# Altium PCB PCB1.PcbDoc
Units mil, origin at the board's own origin, x right, y up, seen from the top; angles counter-clockwise.
Board outline 6000 x 4000 mil, 2 copper layers (Top Layer, Bottom Layer); 11 components, 10 nets, 54 pads, 4 vias.
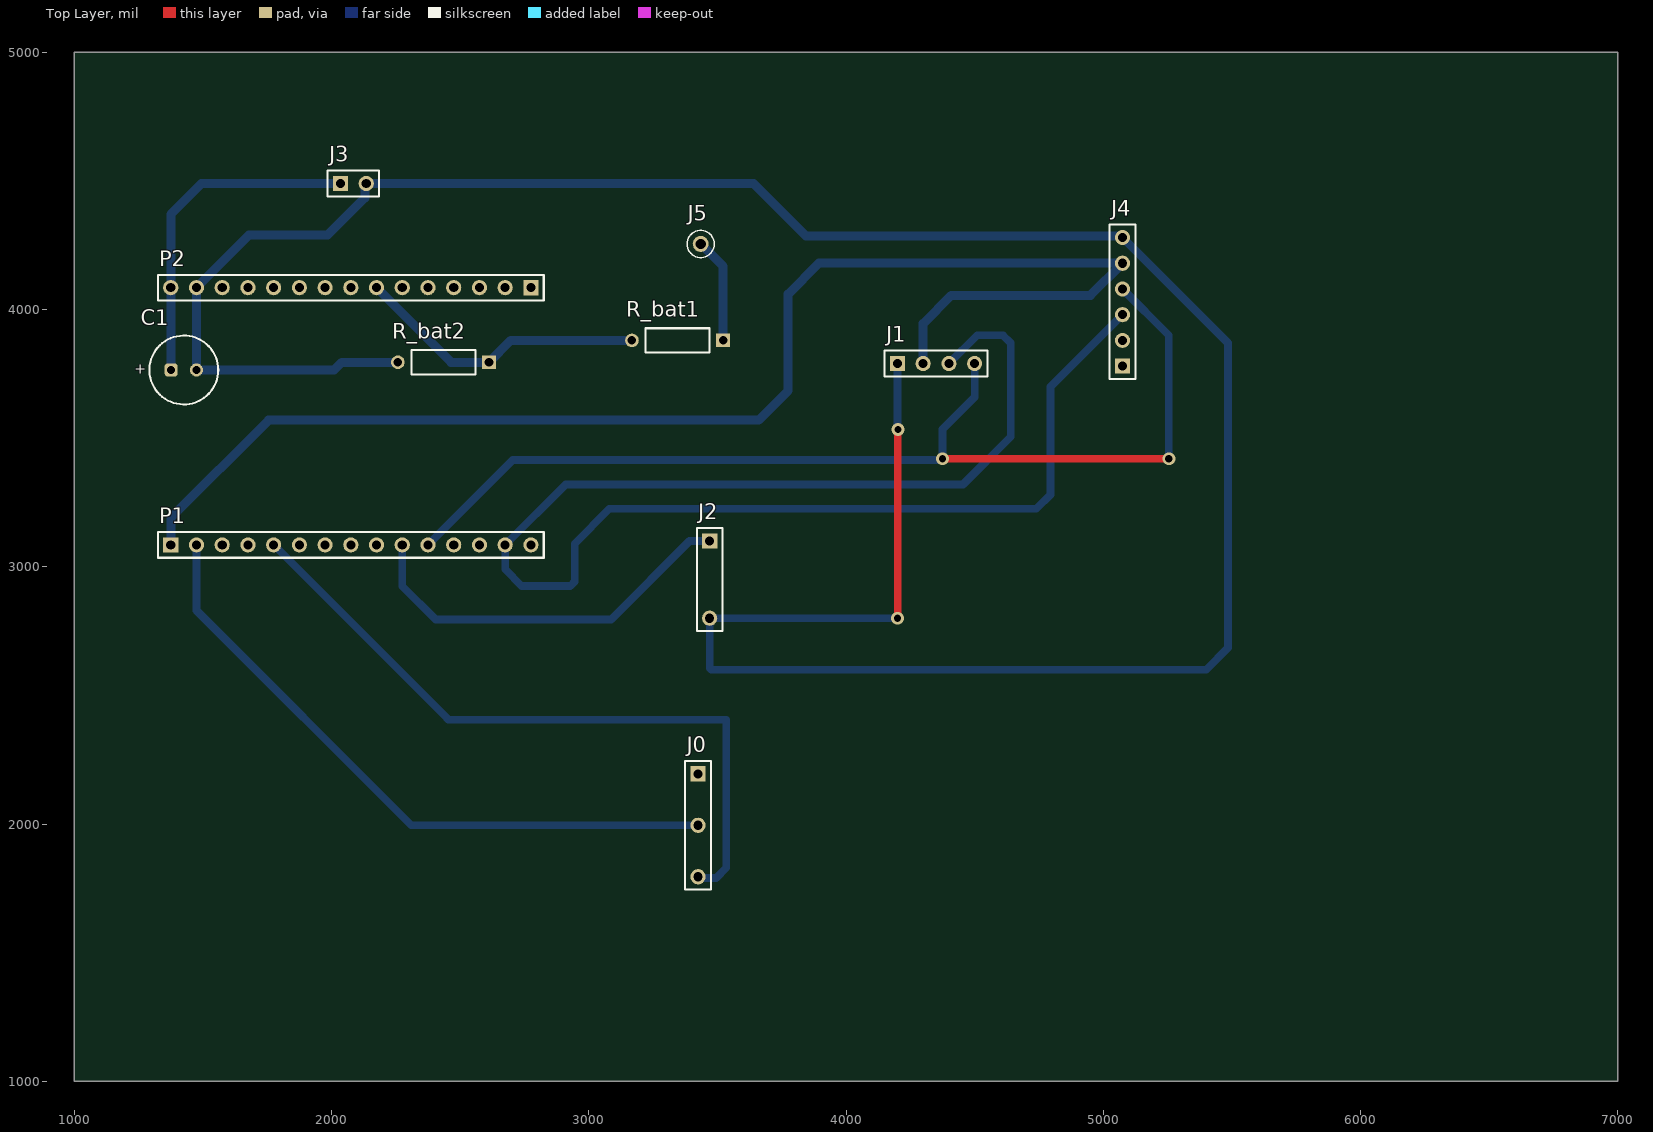
[diagram p0: Top Layer view]
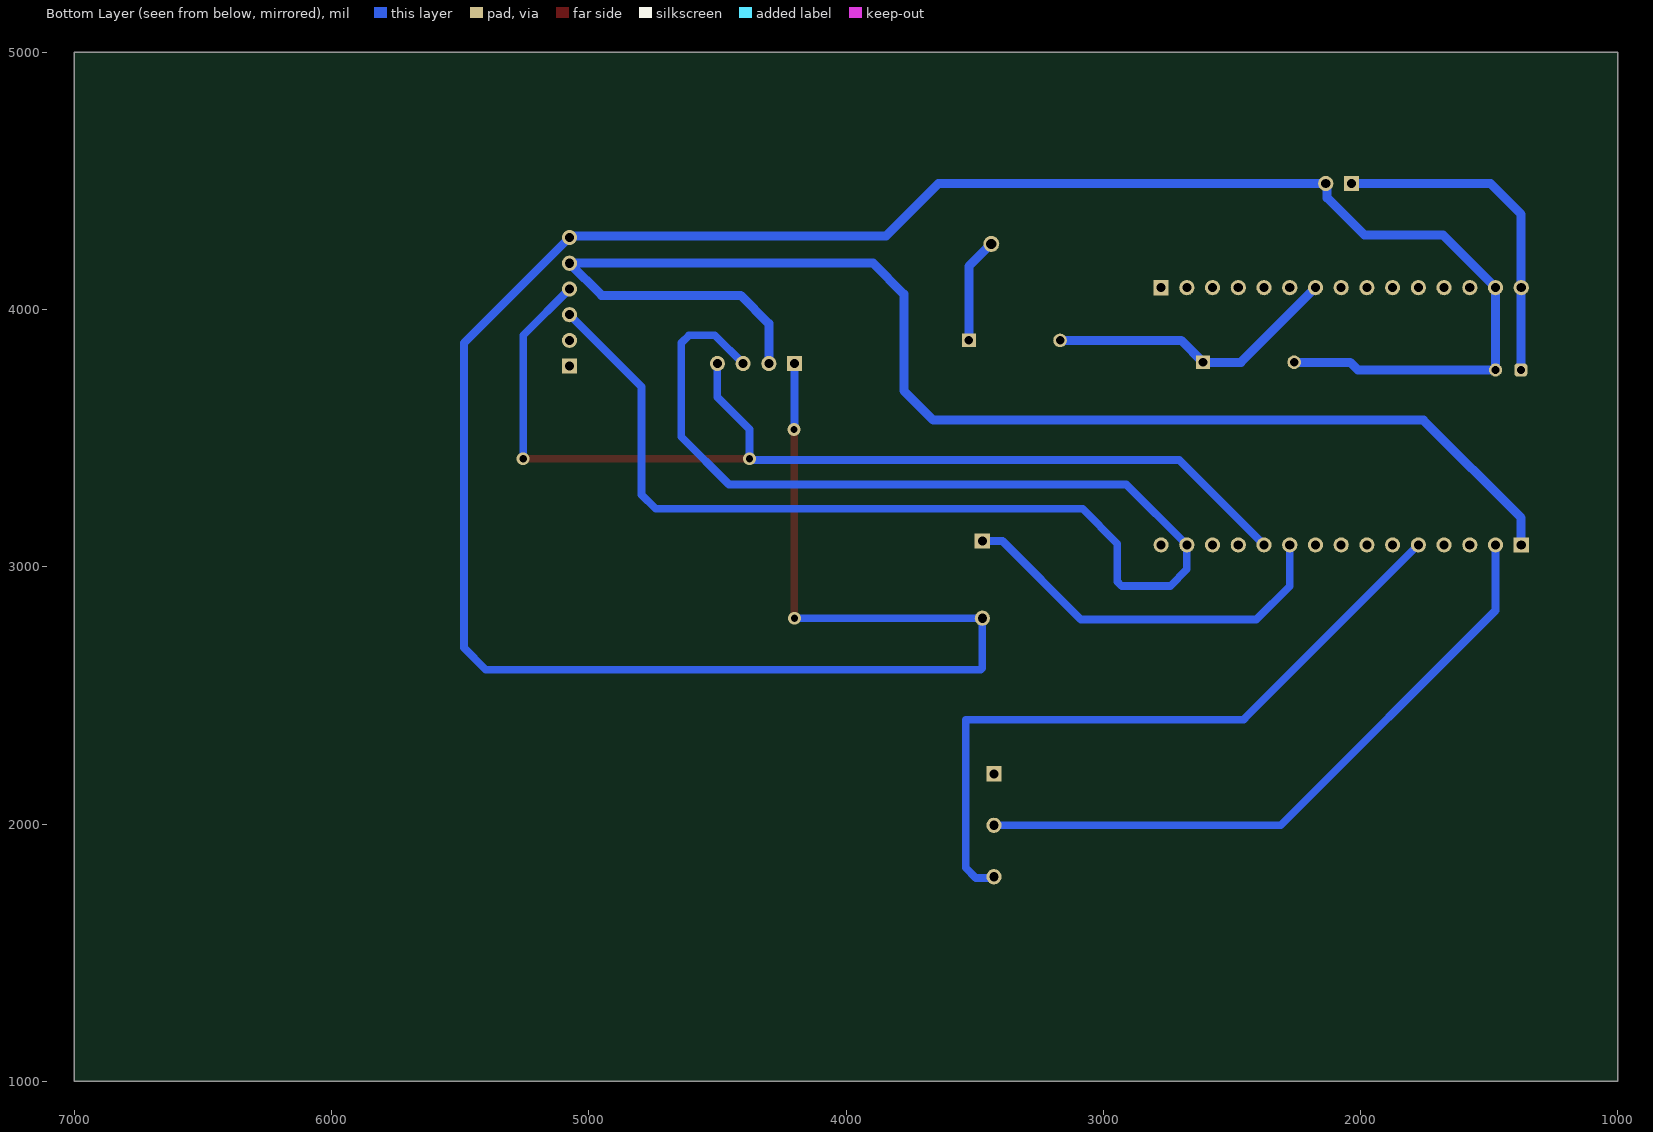
[diagram p1: Bottom Layer view, seen from below]

## Layer stack, top to bottom
Top Solder: solder mask 0.4, Solder Resist, Dk 3.5
Top Layer: signal copper 1.4
Dielectric 1: dielectric 12.6, FR-4, Dk 4.8
Bottom Layer: signal copper 1.4
Bottom Solder: solder mask 0.4, Solder Resist, Dk 3.5

## Board outline
1000,1000 7000,1000 7000,5000 1000,5000

## Design rules (kind name [scope] priority, off if disabled: settings)
Clearance [All] p1: gap=10 ignorepadtopadclearanceinfootprint=FALSE except(15: Arc-Arc Arc-Track Arc-SMDPad Arc-THPad Track-Track Track-SMDPad Track-THPad)
DiffPairsRouting [All] p1: maxlimit=15 minlimit=10 mostfreqgap=15 toplayer_maxgap=10 toplayer_prefgap=10 toplayer_minwidth=15 toplayer_maxwidth=30 toplayer_prefwidth=15 bottomlayer_mingap=15 bottomlayer_minwidth=15 bottomlayer_maxwidth=30 bottomlayer_prefwidth=15 maxuncoupledlength=500
PolygonConnect [All] p1: connectstyle=Relief reliefconductorwidth=10 reliefentries=4 polygonreliefangle="90 Angle" airgapwidth=10
RoutingVias [All] p1: holewidth=28 width=50 viastyle="Through Hole" minholewidth=28 minwidth=50 maxholewidth=28 maxwidth=50
SolderMaskExpansion [All] p1: expansion=4 istentingtop=FALSE
Width [All] p1: maxlimit=35 minlimit=30 preferedwidth=30 minimp=50.000000 maximp=50.000000 favimp=50.000000
29 further rules are at their usual default settings.

## Components (designator, comment, footprint, x,y, rotation, side; value= is the part's Value field where it differs from the comment)
C1 "100uF" WCAP-ATLI_D6.3H11 1425.79,3765 r180 top
J0 "HD_SW" HDR1X5 3425,2195 r270 top
J1 "HD_OLED" HDR1X4#1 4200,3790 r0 top
J2 "HD_BUZZER" HDR1X4#2 3470,3100 r270 top
J3 "HD_POWER" HDR1X2 2035,4490 r0 top
J4 "HD_DS3231" HDR1X6 5075,3780 r90 top
J5 "HD_BATTERY_PERCENT" FP-5000-MFG 3435,4255 r0 top
P1 "ESP32" HDR1X15 1375,3085 r0 top
P2 "ESP32" HDR1X15 2775,4085 r180 top
R_bat1 "100k" RESA60-630X240 3345,3880 r180 top
R_bat2 "100k" RESA60-630X240 2435,3795 r180 top

## Footprints (in the part's own frame and the unit in brackets; to place one, negate y for a bottom-side part, rotate by r counter-clockwise, add the part's x,y. Pads: shape width x height; smd on the part's side, far side on the other; paste and mask are expansions set on the pad)
FP-5000-MFG [mm]
  round 1.57 hole 1.02 paste-2539.97 mask+0: 1(0,0)
  silkscreen extent -1.35,-1.34 1.35,1.34, body extent -1.45,-1.45 1.45,1.45, height 0.25
HDR1X2 [mm] "Connector; Header; 2 Position"
  rect 1.5x1.5 hole 0.9: 1(0,0)
  round 1.5 hole 0.9: 2(2.54,0)
  silkscreen extent -1.27,-1.27 3.81,1.27
HDR1X4#1 [mm] "Connector; Header; 4 Position"
  rect 1.5x1.5 hole 0.9: 1(0,0)
  round 1.5 hole 0.9: 2(2.54,0) 3(5.08,0) 4(7.62,0)
  silkscreen extent -1.27,-1.27 8.89,1.27
HDR1X4#2 [mm] "Connector; Header; 4 Position"
  rect 1.5x1.5 hole 0.9: 1(0,0)
  round 1.5 hole 0.9: 4(7.62,0)
  silkscreen extent -1.27,-1.27 8.89,1.27
HDR1X5 [mm] "Connector; Header; 5 Position"
  rect 1.5x1.5 hole 0.9: 1(0,0)
  round 1.5 hole 0.9: 3(5.08,0) 5(10.16,0)
  silkscreen extent -1.27,-1.27 11.43,1.27
HDR1X6 [mm] "Connector; Header; 6 Position"
  rect 1.5x1.5 hole 0.9: 1(0,0)
  round 1.5 hole 0.9: 2(2.54,0) 3(5.08,0) 4(7.62,0) 5(10.16,0) 6(12.7,0)
  silkscreen extent -1.27,-1.27 13.97,1.27
HDR1X15 [mm] "Connector; Header; 15 Position"
  rect 1.5x1.5 hole 0.9: 1(0,0)
  round 1.5 hole 0.9: 2(2.54,0) 3(5.08,0) 4(7.62,0) 5(10.16,0) 6(12.7,0) 7(15.24,0) 8(17.78,0) 9(20.32,0) 10(22.86,0) 11(25.4,0) 12(27.94,0) 13(30.48,0) 14(33.02,0) 15(35.56,0)
  silkscreen extent -1.27,-1.27 36.83,1.27
RESA60-630X240 [mm] "Axial Resistor, 2-Leads, Dia 2.4mm, Body Length 6.3mm"
  rect 1.35x1.35 hole 0.85: 1(-4.5,0)
  round 1.35 hole 0.85: 2(4.5,0)
  silkscreen extent -3.15,-1.2 3.15,1.2, body extent -3.15,-1.2 3.15,1.2, height 2.4
WCAP-ATLI_D6.3H11 [mm] "Aluminum Electrolytic Capacitors, 6.3x11mm"
  rrect50% 1.3x1.3 hole 0.8: 1(1.25,0)
  round 1.3 hole 0.8: 2(-1.25,0)
  silkscreen extent -3.4,-3.4 3.4,3.4, body extent -3.14,-3.15 3.15,3.15, height 11.31

## Part data
C1: library part CMP-03913-53914350-1, "860080373005 WCAP-ATLI Aluminum Electrolytic Capacitors", Capacitance=100µF, Case/Package=Radial, Leakage Current=16µA, Max Operating Temperature=105°C, Min Operating Temperature=-55°C, Ripple Current=360mA, Tolerance=20%, Voltage Rating=16V, Diameter=6.3mm, Height=11mm, Height - Seated (Max)=12.4968mm, Impedance=250mΩ, Lead Pitch=2.4892mm, Length=11mm, Life (Hours)=2000hours, Material=Aluminium, Mount="Through Hole", NexarPartId=53914350, Packaging="Tape & Box (TB)", Pitch=2.5mm, Polarity=Polar, RoHS=Compliant
J0: library part "Header 5", "Header, 5-Pin", LatestRevisionDate=17-Jul-2002, LatestRevisionNote="Re-released for DXP Platform.", Publisher="Altium Limited"
J1 J2: library part "Header 4", "Header, 4-Pin", LatestRevisionDate=17-Jul-2002, LatestRevisionNote="Re-released for DXP Platform.", Publisher="Altium Limited"
J3: library part "Header 2", "Header, 2-Pin", LatestRevisionDate=17-Jul-2002, LatestRevisionNote="Re-released for DXP Platform.", Publisher="Altium Limited"
J4: library part "Header 6", "Header, 6-Pin", LatestRevisionDate=17-Jul-2002, LatestRevisionNote="Re-released for DXP Platform.", Publisher="Altium Limited"
J5: library part CMP-19636-000027-1, "PC TEST POINT MINIATURE RED", Color=Red, Flammability Rating="UL94 V-0", Package Quantity=100, Body Material=Bronze, Contact Material=Bronze, Contact Plating=Tin, Height=0.3inch, Hole Diameter=1.6mm, Housing Color=Red, Inside Diameter=1.27mm, Insulation=Insulated, Lead Free="Lead Free", Length=7.62mm, Material=Nylon, Mount=PCB, Number of Contacts=1, Number of Ports=1, Orientation=Straight, Outside Diameter=2.54mm, Packaging=Bulk, Plating=Silver, REACH SVHC="No SVHC", RoHS Compliant=Yes, Series=THM
P1 P2: library part "Header 15", "Header, 15-Pin", LatestRevisionDate=17-Jul-2002, LatestRevisionNote="Re-released for DXP Platform.", Publisher="Altium Limited"
R_bat1 R_bat2: library part CMP-1659-00073-1, "Axial Resistor, 100 KOhm, +/- 1%, 0.25 W, -55 to 155 degC, 2-Pin THD, RoHS, Bulk", Case\Package=Axial, Max Operating Temperature="155 degC", Min Operating Temperature="-55 degC", Package Quantity=200, Power Rating="250 mW", Resistance="475 Ohm", Tolerance=1%, Voltage Rating="250 V", ComponentLink1Description="Manufacturer URL", ComponentLink1URL=http://www.yageo.com/, ComponentLink2Description=Datasheet, ComponentLink2URL=http://www.yageo.com/documents/recent/Yageo%20LR_MFR_2013.pdf, DatasheetVersion=Apr-13, Length="0.248 inch", Mount="Through Hole", PackageDescription="2-Pin Axial Lead, Dia 2.4 mm, Body Length 6.3 mm", PackageReference=MFR-25, Packaging=Bulk, RoHSCompliant=true

## Via types
v1: diameter 50, hole 28, Top Layer to Bottom Layer, 4 vias

## Nets (pads, with @x,y where several pads share a name; then routed paths per layer and width w, separated by ;. In a path a pad name is that pad's centre, name@x,y a point inside that pad or via, vN(x,y) a via of type N, cw(c..) or ccw(c..) an arc to the next point about the centre after c; other vN are vias at no path point)
NetC1_1: C1.1 J3.1 P2.15 | length 1305.4
  Bottom Layer w30: P2.15 P2.15@1375.79,4084.21 ; C1.1@1375.79,3765.79 C1.1
  Bottom Layer w35: P2.15 1375,4370 1495,4490 J3.1@2025,4490 ; C1.1@1375.79,3765.79 P2.15@1375.79,4084.21
NetC1_2: C1.2 J1.1 J2.4 J3.2 J4.6 P2.14 R_bat2.2 | length 10729.4
  Top Layer w30: v1(4200,2800) 4201.31,2801.31 4201.31,3531.9 v1(4202.63,3533.22)
  Bottom Layer w30: J3.2@2129.44,4484.44 J3.2 ; v1(4200,2800) J2.4 3470,2605.86 3475.86,2600 5400,2600 5485,2685 5485,3870 J4.6 J4.6@5070,4285 ; v1@4200,3535.84 J1.1
  Bottom Layer w35: J3.2@2129.44,4484.44 2129.44,4434.44 1985,4290 1680,4290 P2.14 C1.2 2010,3765 2040,3795 R_bat2.2 ; J3.2 3640,4490 3845,4285 J4.6@5070,4285
NetJ0_3: J0.3 P1.2 | length 2550.9
  Bottom Layer w30: P1.2 1475,2830 2310,1995 J0.3
NetJ0_5: J0.5 P1.5 | length 2743.2
  Bottom Layer w30: P1.5 2449.14,2410.86 2455,2405 3535,2405 3535,1830 3495,1790 J0.5@3425,1790
NetJ1_2: J1.2 J4.5 P1.1 | length 5462.1
  Bottom Layer w35: P1.1 1375,3190 1755,3570 3660,3570 3775,3685 3775,4060 3895,4180 J4.5 4950,4055 4410,4055 4300,3945 J1.2
NetJ1_3: J1.3 J4.3 P1.14 | length 6093.3
  Bottom Layer w30: J1.3 4510,3900 4610,3900 4640,3870 4640,3505 4455,3320 2910,3320 P1.14 2675,2990 2740,2925 2927.43,2925 2945,2942.57 2945,3090 3080,3225 4740,3225 4795,3280 4795,3700 J4.3
NetJ1_4: J1.4 J4.4 P1.11 | length 4175.1
  Top Layer w30: v1(4375,3420) v1(5255,3420)
  Bottom Layer w15: v1@4370,3415 v1(4375,3420)
  Bottom Layer w30: P1.11 2705,3415 v1@4370,3415 ; v1(4375,3420) 4375,3535 4500,3660 J1.4 ; J4.4 5255,3900 v1(5255,3420)
NetJ2_1: J2.1 P1.10 | length 1535.2
  Bottom Layer w30: P1.10 2275,2925 2405,2795 3086.72,2795 3391.72,3100 J2.1
NetJ5_1: J5.1 R_bat1.1 | length 411.1
  Bottom Layer w35: J5.1 3522.17,4167.83 R_bat1.1
NetP2_7: P2.7 R_bat1.2 R_bat2.1 | length 1148.2
  Bottom Layer w35: P2.7 2465,3795 R_bat2.1 2697.17,3880 R_bat1.2
pads on no net: J0.1 J4.1 J4.2 P1.3 P1.4 P1.6 P1.7 P1.8 P1.9 P1.12 P1.13 P1.15 P2.1 P2.2 P2.3 P2.4 P2.5 P2.6 P2.8 P2.9 P2.10 P2.11 P2.12 P2.13

## Dimensions
6795,4795 to 6515,1025 on Bottom Layer
1020,4765 to 7000,5000 on Bottom Layer
1375,2750 to 1475,2755 on Top Layer
1310,3085 to 1310,4085 on Top Layer

## Text inside footprints (layer, text, board x,y; h text height)
C1: Top Overlay "+" at 1280.12,3784.68 h39.37 r180